# Altium PCB 红外传感器_new.PcbDoc
Units mm, origin at the board's own origin, x right, y up, seen from the top; angles counter-clockwise.
Board outline 152.4 x 101.6 mm, 2 copper layers (Top Layer, Bottom Layer); 17 components, 13 nets, 46 pads, 7 vias.
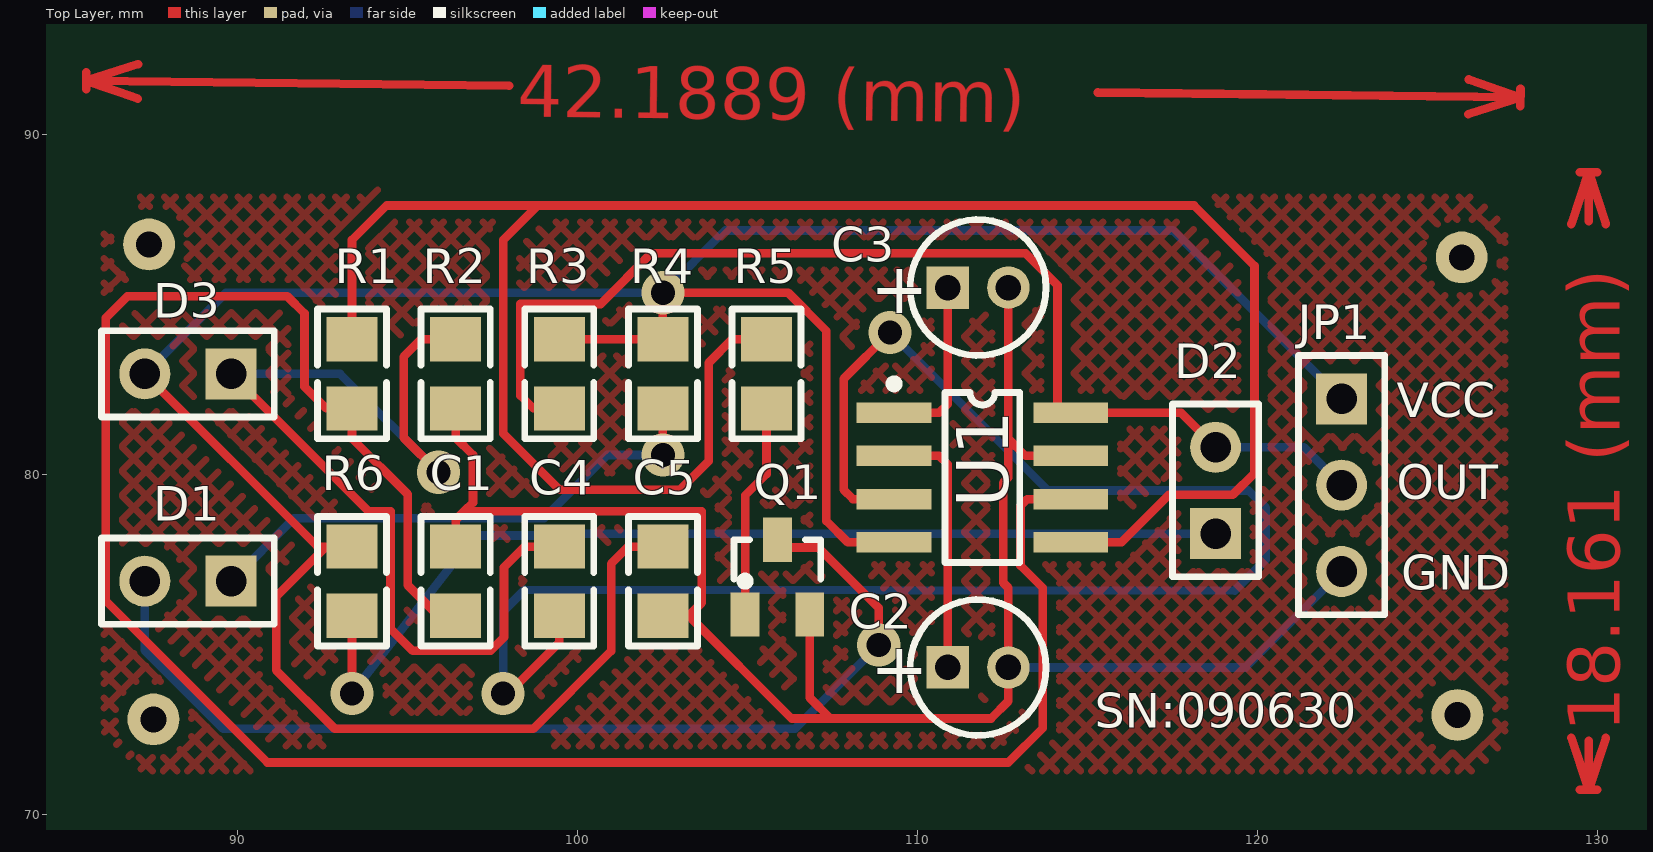
[diagram p0: Top Layer view]
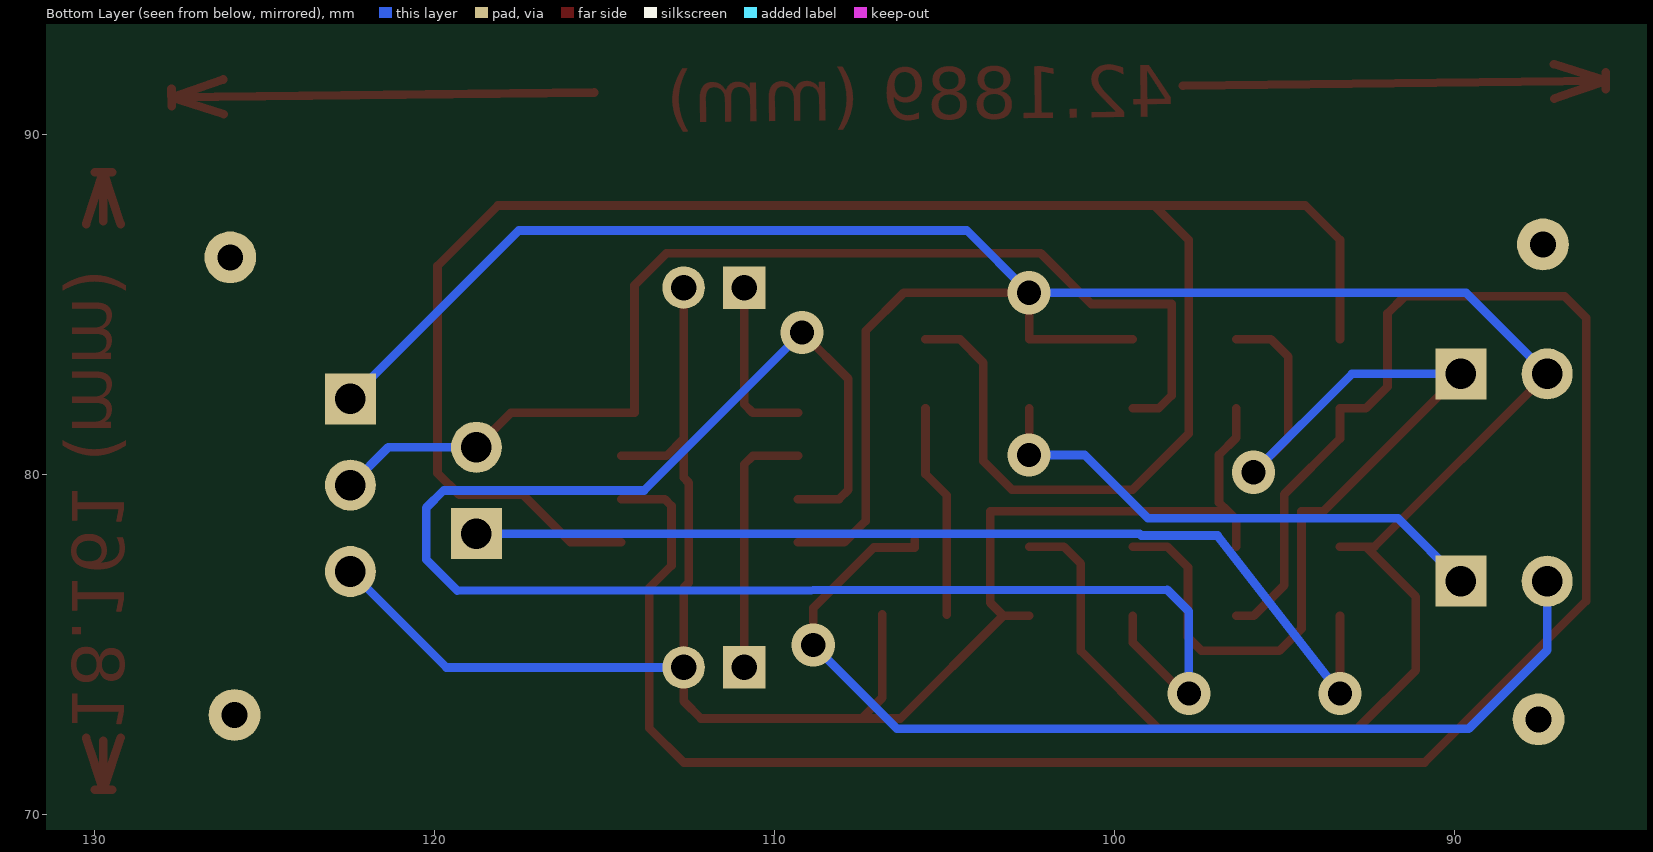
[diagram p1: Bottom Layer view, seen from below]

## Layer stack, top to bottom
Top Layer: signal copper 0.0356
Dielectric: dielectric 0.32, FR-4, Dk 4.8
Bottom Layer: signal copper 0.0356

## Board outline
25.4,25.4 177.8,25.4 177.8,127 25.4,127

## Design rules (kind name [scope] priority, off if disabled: settings)
Clearance [All] p1: gap=0.254
ComponentClearance [All] p1: gap=0.254 collisioncheckmode=3 verticalgap=0.254
PolygonConnect [All] p1: connectstyle=Relief reliefconductorwidth=0.254 reliefentries=4 polygonreliefangle="90 Angle"
RoutingVias [All] p1: holewidth=0.711 width=1.27 viastyle="Through Hole" minholewidth=0.711 minwidth=1.27 maxholewidth=0.711 maxwidth=1.27
SolderMaskExpansion [All] p1: expansion=0.102
TestPointUsage [All] p1: valid=0 allowmultiple=FALSE
Testpoint [All] p1: side=15 testpointundercomponent=TRUE minsize=1.016 maxsize=2.54 preferedsize=1.524 minholesize=0 maxholesize=1.016 preferedholesize=0.813 testpointgrid=0.025 style=1023 order=0-112345678
Width [All] p1: maxlimit=0.254 minlimit=0.254 preferedwidth=0.254
17 further rules are at their usual default settings.

## Components (designator, comment, footprint, x,y, rotation, side; value= is the part's Value field where it differs from the comment)
C1 "" TP-0805-R 97.675,79.404 r90 top
C2 "" DJDR_4mm 110.883,74.324 r0 top
C3 "" DJDR_4mm 110.883,85.5 r0 top
C4 "" TP-0805-R 100.723,79.404 r90 top
C5 "" TP-0805-R 103.771,79.404 r90 top
D1 "发射管" CPDR 88.531,76.864 r180 top
D2 "LED" CPDR 118.757,79.531 r90 top
D3 "" CPDR 88.531,82.96 r180 top (schematic designator 接收管)
JP1 "PZ_3" HDR-3 121.297,75.975 r270 top (schematic designator P1)
Q1 "NPN" SO-G3 106.819,76.864 r0 top
R1 "" TP-0805-R 92.087,80.42 r270 top
R2 "" TP-0805-R 97.675,85.5 r90 top
R3 "" TP-0805-R 100.723,85.5 r90 top
R4 "" TP-0805-R 101.231,80.42 r270 top
R5 "" TP-0805-R 106.819,85.5 r90 top
R6 "" TP-0805-R 94.627,79.404 r90 top
U1 "LM567CM" M08A 111.899,79.912 r270 top

## Footprints (in the part's own frame and the unit in brackets; to place one, negate y for a bottom-side part, rotate by r counter-clockwise, add the part's x,y. Pads: shape width x height; smd on the part's side, far side on the other; paste and mask are expansions set on the pad)
CPDR [mm] "瓷片电容"
  rect 1.5x1.5 hole 0.9: 1(-1.27,0)
  round 1.5 hole 0.9: 2(1.27,0)
  silkscreen extent -2.54,-1.27 2.54,1.27
DJDR_4mm [mm] "电解电容"
  rect 1.25x1.25 hole 0.75: 1(0,0)
  round 1.25 hole 0.75: 2(1.778,0)
  silkscreen extent -1.11,-2 2.89,2
HDR-3 [mm]
  rect 1.5x1.5 hole 0.9: 1(-6.253,1.165)
  round 1.5 hole 0.9: 2(-3.713,1.165) 3(-1.173,1.165)
  silkscreen extent -7.52,-0.11 0.1,2.43
M08A [mm] "Small Outline; 8 Leads; Body Width 3.9 mm; Pitch 1.27 mm"
  rect 0.6x2.2 smd: 1(-1.905,-2.6) 2(-0.635,-2.6) 3(0.635,-2.6) 4(1.905,-2.6) 5(1.905,2.6) 6(0.635,2.6) 7(-0.635,2.6) 8(-1.905,2.6)
  silkscreen extent -2.88,-2.72 2.5,1.1
SO-G3 [mm] "SOT-23; 3 Leads; Body 3.0 x 2.6 mm, inc. leads (LxW max)"
  rect 0.85x1.3 smd: 1(-1.9,-0.983) 2(0,-0.983) 3(-0.95,1.217)
  silkscreen extent -2.23,-0.12 0.32,1.22
TP-0805-R [mm]
  rect 1.3x1.5 smd: 1(-3.556,1.27) 2(-1.524,1.27)
  silkscreen extent -4.44,0.25 -0.64,2.29

## Part data
C1 C4 C5: library part CPDR, "瓷片电容"
C2 C3: library part DJDR, "电解电容"
D1: library part LED, "发光二极管"
D2: "发光二极管"
D3: library part JS2JG, "接收二极管"
JP1: "排针——3"
Q1: library part TPSJG_NPN, "贴片三极管——NPN"
R1 R2 R3 R4 R5 R6: library part Res, "电阻"
U1: "Tone Decoder"

## Free pads (board coordinates)
  round 1.524 hole 0.762: 0(125.996,86.389) 1(125.869,72.927) 2(87.388,86.77) 3(87.515,72.8)

## Via types
v1: diameter 1.27, hole 0.711, Top Layer to Bottom Layer, 7 vias

## Nets (pads, with @x,y where several pads share a name; then routed paths per layer and width w, separated by ;. In a path a pad name is that pad's centre, name@x,y a point inside that pad or via, vN(x,y) a via of type N, cw(c..) or ccw(c..) an arc to the next point about the centre after c; other vN are vias at no path point)
GND: C1.2 C2.2 C3.2 C5.1 JP1.3 Q1.2 R2.1 U1.7 | length 54.9
  Top Layer w0.254: C1.2 96.405,78.667 96.659,78.921 ; R2.1 96.405,81.08 96.913,80.572 96.913,79.175 96.659,78.921 ; C5.1 103.263,75.848 ; Q1.2 106.819,73.435 107.429,72.825 ; C3.2 112.661,81.055 ; U1.7 113.169,80.547 112.661,81.055 ; 96.659,78.921 103.644,78.921 103.644,76.229 103.263,75.848 ; 103.263,75.848 106.286,72.825 107.429,72.825 ; 107.429,72.825 112.153,72.825 112.661,73.333 C2.2 112.661,76.667 112.51,76.818 112.51,79.761 112.661,79.912 112.661,81.055
  Bottom Layer w0.254: C2.2 119.638,74.324 JP1.3
NetC1_1: C1.1 R1.2 U1.6 | length 64.4
  Top Layer w0.254: C1.1 95.893,75.848 94.996,76.745 94.996,79.419 93.357,81.058 R1.2 92.595,81.944 91.96,82.579 91.96,84.738 91.452,85.246 86.753,85.246 86.118,84.611 86.118,76.28 90.868,71.53 112.661,71.53 113.677,72.546 113.677,76.662 113.018,77.321 113.018,79.075 113.22,79.277 U1.6
NetC2_1: C2.1 U1.2 | length 7.7
  Top Layer w0.254: U1.2 110.629,80.547 110.883,80.293 C2.1
NetC3_1: C3.1 U1.1 | length 5.1
  Top Layer w0.254: U1.1 110.629,81.817 110.883,82.071 C3.1
NetC4_1: C4.1 U1.3 | length 50.1
  Top Layer w0.254: v1(97.802,73.562) 97.929,73.537 99.453,75.061 C4.1 ; v1(109.182,84.179) 107.818,82.816 107.818,79.548 108.089,79.277 U1.3
  Bottom Layer w0.254: v1(97.802,73.562) 97.802,75.975 98.437,76.61 119.316,76.585 120.231,77.499 120.231,79.023 119.723,79.531 113.83,79.531 v1(109.182,84.179)
NetC4_2: C4.2 D3.1 R2.2 | length 30.4
  Top Layer w0.254: D3.1 93.85,78.911 94.488,78.911 94.488,75.467 95.138,74.817 97.432,74.817 97.828,75.213 97.828,77.27 98.437,77.88 C4.2 ; v1(95.897,80.064) 94.881,81.08 94.881,83.468 95.389,83.976 R2.2
  Bottom Layer w0.254: D3.1 93.002,82.96 v1(95.897,80.064)
NetD1_1: D1.1 R4.2 | length 15.6
  Top Layer w0.254: v1(102.501,80.572) R4.2
  Bottom Layer w0.254: D1.1 91.651,78.714 99.006,78.714 100.864,80.572 v1(102.501,80.572)
NetD1_2: D1.2 Q1.3 | length 30.6
  Top Layer w0.254: Q1.3 105.869,77.855 107.073,77.855 108.851,76.077 v1(108.851,74.984)
  Bottom Layer w0.254: D1.2 87.261,74.832 89.573,72.521 106.388,72.521 v1(108.851,74.984)
NetD2_1: D2.1 R6.1 | length 30
  Top Layer w0.254: v1(93.357,73.562) 93.357,74.603 R6.1
  Bottom Layer w0.254: v1(93.357,73.562) 96.96,78.206 99.195,78.206 99.25,78.261 D2.1
NetD2_2: D2.2 JP1.2 R3.1 U1.8 | length 33.8
  Top Layer w0.254: R3.1 98.691,81.944 98.31,82.325 98.31,85.017 100.673,85.017 102.161,86.506 113.169,86.506 114.109,85.566 114.109,81.817 U1.8 117.741,81.817 D2.2
  Bottom Layer w0.254: D2.2 121.349,80.801 JP1.2
NetQ1_1: Q1.1 R5.1 | length 6.3
  Top Layer w0.254: Q1.1 104.919,79.383 105.549,80.014 R5.1
NetR1_1: R1.1 R5.2 U1.5 | length 62
  Top Layer w0.254: R1.1 93.357,86.897 94.373,87.913 118.122,87.913 119.9,86.135 119.9,80.039 119.265,79.404 117.386,79.404 115.989,78.007 U1.5 ; 98.818,87.913 97.802,86.897 97.802,81.207 99.453,79.556 103.009,79.556 103.848,80.395 103.848,83.29 104.533,83.976 R5.2
VCC: C5.2 D3.2 JP1.1 R3.2 R4.1 R6.2 U1.4 | length 84.8
  Top Layer w0.254: D3.2 92.341,77.88 92.595,77.88 ; R6.2 92.595,77.88 ; R3.2 R4.1 v1(102.501,85.348) 106.184,85.348 107.31,84.222 107.31,78.634 107.937,78.007 U1.4 ; C5.2 101.485,77.88 100.977,77.372 100.977,74.807 98.691,72.521 92.848,72.521 91.124,74.244 91.124,76.409 92.595,77.88
  Bottom Layer w0.254: D3.2 89.649,85.348 v1(102.501,85.348) 104.33,87.176 117.514,87.176 JP1.1
copper on no net: | length 42.6
  Top Layer w0.254: 85.534,91.329 85.54,91.837 ; 87.055,91.057 85.537,91.583 ; 87.067,92.073 85.537,91.583 ; 97.972,91.438 85.537,91.583 ; 115.289,91.237 127.723,91.092 ; 126.194,90.602 127.723,91.092 ; 126.205,91.618 127.723,91.092 ; 127.72,90.838 127.726,91.346 ; 129.222,72.255 129.73,70.731 ; 129.222,87.368 129.73,88.892 ; 129.476,70.731 129.984,70.731 ; 129.476,88.892 129.984,88.892 ; 129.73,72.169 129.73,70.731 ; 129.73,87.455 129.73,88.892 ; 130.238,72.255 129.73,70.731 ; 130.238,87.368 129.73,88.892

## Polygon pours and split planes (outlines as drawn)
no net on Top Layer (hatched 45Degree grid 0.508 track 0.203): 86.067,87.151 87.085,88.167 126.376,88.167 127.266,87.278 127.266,72.169 126.376,71.28 87.212,71.28 86.067,72.423

## Other copper
Top Layer:
  text "42.1889 (mm)" at 98.216,90.521 h1.52 r359.33
  text "18.161 (mm)" at 130.644,72.423 h1.52 r90

## Silkscreen, mask and mechanical layers (free items; w line width, h text height)
Top Overlay:
  text "VCC" at 124.091,81.69 h1.02
  text "OUT" at 124.091,79.277 h1.02
  text "GND" at 124.218,76.61 h1.02
  text "SN:090630" at 115.201,72.546 h1.02
Mechanical 1:
  lines w0.254: 85.737,72.165 85.737,87.405 86.88,88.548 126.58,88.552 127.596,87.536 127.647,71.911 126.631,70.895 87.007,70.895 85.737,72.165

## Text inside footprints (layer, text, board x,y; h text height)
C2: Top Overlay "+" at 108.597,73.562 h1.5
C3: Top Overlay "+" at 108.597,84.738 h1.5